# EAGLE board FilterBoard_+-8V_MAX (EAGLE 6.5.0)
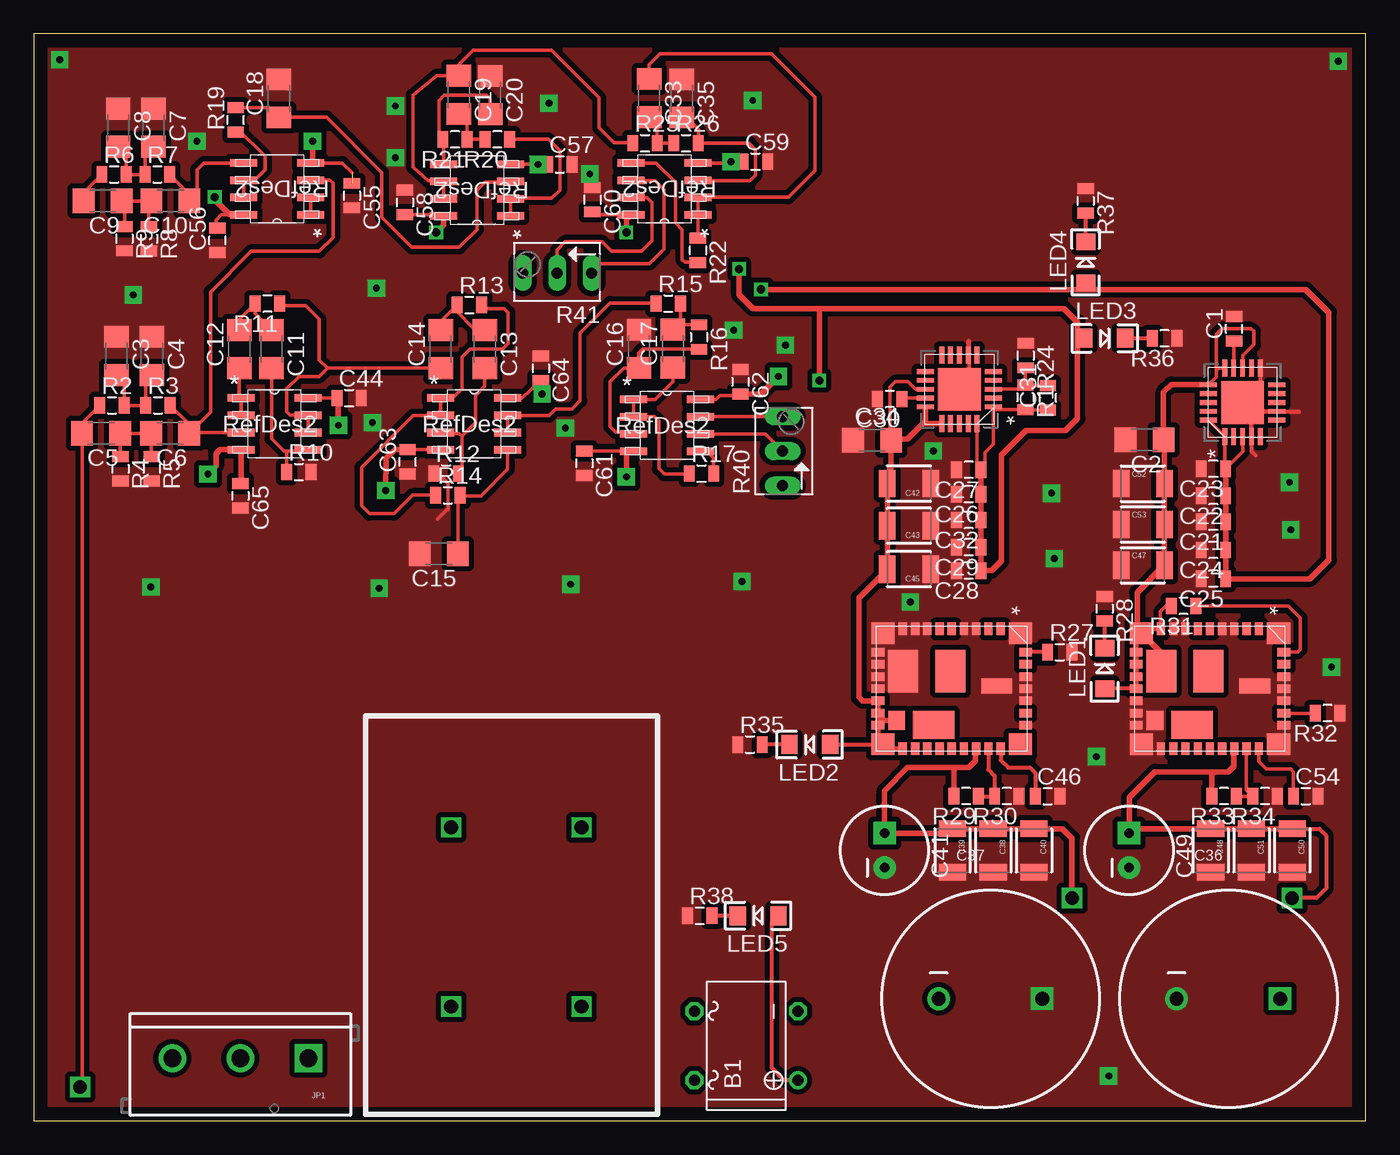
[diagram p0: board, top side]
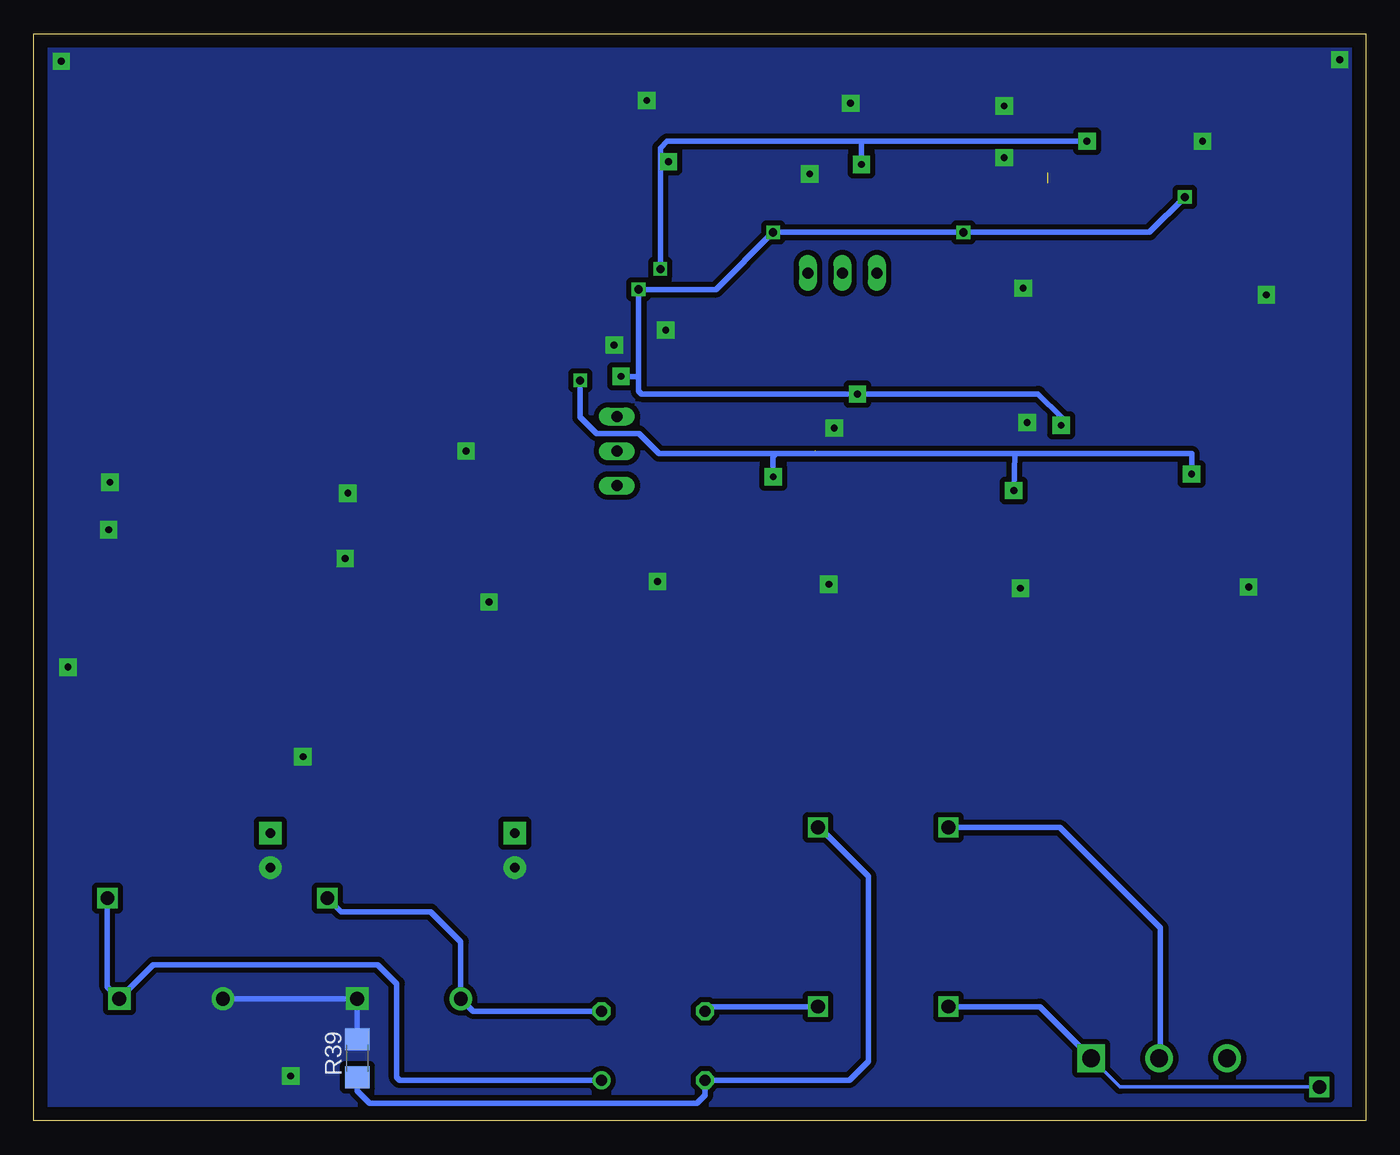
[diagram p1: board, bottom side, seen from below]

Size 98 x 80 mm. Coordinates in mm from the lower left corner, seen from the top.
Outline: 0,0 98,0 98,80 0,80 0,0
Copper layers (1*16): Top 0.035mm / dielectric 1.5mm / Bottom 0.035mm
Design rules "default *": minimum track width 10mil, minimum drill 24mil, track to track 15mil, track to pad 15mil, pad to pad 15mil, via to via 15mil, smd to smd 15mil, copper to edge 40mil, drill to drill 8mil, minimum pad ring 10mil, minimum via ring 8mil, stop-mask expansion 4mil, vias tented up to drill 0mil, thermal gap 10mil
tKeepout: area 30.7,8.4 to 40.3,21.6

## Footprints (pad centres in the part's own frame; a part is rotated, then mirrored left to right if it is on the bottom)
B-DIL = drill 0.813: + -2.54,-3.81 | drill 0.813 octagon: - 2.54,-3.81; AC1 2.54,3.81; AC2 -2.54,3.81
0805 = smd 0.8 x 1.2: 1 -0.9,0; 2 0.9,0
1206 = smd 1.6 x 1.8: 1 -1.4,0; 2 1.4,0
CPOL-RADIAL-1000UF-63V = drill 1.016 pad 1.651 square: 1 3.81,0 | drill 1.016 pad 1.676: 2 -3.81,0
1210 = smd 1.2 x 2: 1 -1.6,0; 2 1.6,0
CPOL-RADIAL-100UF-25V = drill 0.7 pad 1.651 square: 1 1.27,0 | drill 0.7 pad 1.651: 2 -1.27,0
SCREWTERMINAL-5MM-3 = drill 1.3 pad 2.032 square: 1 0,0 | drill 1.3 pad 2.032: 2 5,0; 3 10,0
LED-1206 = smd 1.2 x 1.4: A -1.5,0; C 1.5,0
B64Y = drill 0.813 long: A 2.54,0; E -2.54,0; S 0,0
D8 = smd 1.981 x 0.559: 1 -2.464,1.905; 2 -2.464,0.635; 3 -2.464,-0.635; 4 -2.464,-1.905; 5 2.464,-1.905; 6 2.464,-0.635; 7 2.464,0.635; 8 2.464,1.905
RGW20_3P15X3P15 = smd 1.25 x 0.356: 1 -2.518,1.295; 2 -2.518,0.66; 3 -2.518,0; 4 -2.518,-0.66; 5 -2.518,-1.295; 11 2.518,-1.295; 12 2.518,-0.66; 13 2.518,0; 14 2.518,0.66; 15 2.518,1.295 | smd 0.356 x 1.25: 6 -1.295,-2.518; 7 -0.66,-2.518; 8 0,-2.518; 9 0.66,-2.518; 10 1.295,-2.518; 16 1.295,2.518; 17 0.66,2.518; 18 0,2.518; 19 -0.66,2.518; 20 -1.295,2.518 | smd 3.15 x 3.15: 21 0,0
RKG41 = smd 1.6 x 1.702: 1 0,0; 11 0,-10.109; 19 8.179,-10.109; 29 8.179,0 | smd 0.94 x 0.61: 2 -0.33,-1.448; 3 -0.33,-2.362; 4 -0.33,-3.251; 5 -0.33,-4.166; 6 -0.33,-5.055; 7 -0.33,-5.944; 8 -0.33,-6.858; 9 -0.33,-7.747; 10 -0.33,-8.661; 20 8.509,-8.661; 21 8.509,-7.747; 22 8.509,-6.858; 23 8.509,-5.944; 24 8.509,-5.055; 25 8.509,-4.166; 26 8.509,-3.251; 27 8.509,-2.362; 28 8.509,-1.448 | smd 0.61 x 0.94: 12 1.397,-10.49; 13 2.286,-10.49; 14 3.2,-10.49; 15 4.089,-10.49; 16 4.978,-10.49; 17 5.893,-10.49; 18 6.782,-10.49; 30 6.782,0.381; 31 5.893,0.381; 32 4.978,0.381; 33 4.089,0.381; 34 3.2,0.381; 35 2.286,0.381; 36 1.397,0.381 | smd 1.1 x 2.25: 37 3.88,-1.75 | smd 3.1 x 2.2: 38 2.8,-5.16; 39 2.8,-8.64 | smd 1.4 x 1.24: 40 6.43,-9.11 | smd 2.04 x 3.05: 41 6.75,-6.37

## Placement (x,y rotation side)
B1  [B-DIL]  52.42,5.53 90 top
C1  1uF  [0805]  88.33,58.3 90 top
C2  10uF  [1206]  81.73,50.12 180 top
C3  22nF  [1206]  6.08,56.3 270 top
C4  22nF  [1206]  8.68,56.3 270 top
C5  22nF  [1206]  4.94,50.6 180 top
C6  22nF  [1206]  10.02,50.6 180 top
C7  22nF  [1206]  8.8,73.1 270 top
C8  22nF  [1206]  6.2,73.1 270 top
C9  22nF  [1206]  5.06,67.7 180 top
C10  22nF  [1206]  10.04,67.7 180 top
C11  [1206]  17.49,56.8 270 top
C12  [1206]  15.11,56.8 90 top
C13  [1206]  33.17,56.8 270 top
C14  [1206]  29.93,56.8 90 top
C15  [1206]  29.8,41.73 180 top
C16  [1206]  44.53,56.82 90 top
C17  [1206]  47.03,56.84 90 top
C18  [1206]  18.03,75.26 90 top
C19  [1206]  31.27,75.52 270 top
C20  [1206]  33.57,75.5 270 top
C21  10uF  [0805]  86.8,44.1 180 top
C22  10uF  [0805]  86.8,46 180 top
C23  10uF  [0805]  86.8,48 180 top
C24  10uF  [0805]  86.8,42.02 180 top
C25  10uF  [0805]  86.8,39.9 180 top
C26  10uF  [0805]  68.8,46.12 180 top
C27  10uF  [0805]  68.8,47.92 180 top
C28  10uF  [0805]  68.8,40.5 180 top
C29  10uF  [0805]  68.8,42.22 180 top
C30  1uF  [0805]  62.99,53.12 180 top
C31  10nF  [0805]  74.62,53.23 90 top
C32  10uF  [0805]  68.8,44.22 180 top
C33  [1206]  45.27,75.28 270 top
C34  10uF  [1206]  61.68,50.1 0 top
C35  [1206]  47.67,75.26 270 top
C36  [CPOL-RADIAL-1000UF-63V]  87.91,8.99 0 top
C37  [CPOL-RADIAL-1000UF-63V]  70.4,8.99 0 top
C38  4.7uF 50V  [1210]  70.6,19.9 270 top
C39  4.7uF 50V  [1210]  67.6,19.9 270 top
C40  2.2uF 100V  [1210]  73.6,19.9 270 top
C41  22uF 100V  [CPOL-RADIAL-100UF-25V]  62.6,19.9 90 top
C42  22uF 25V  [1210]  64.4,46.9 180 top
C43  22uF 25V  [1210]  64.4,43.8 180 top
C44  10nF  [0805]  23.2,53.2 0 top
C45  22uF 25V  [1210]  64.4,40.6 180 top
C46  10nF  [0805]  74.6,23.9 0 top
C47  22uF  [1210]  81.6,40.9 0 top
C48  2.2uF 100V  [1210]  86.6,19.9 270 top
C49  27uF 100V  [CPOL-RADIAL-100UF-25V]  80.6,19.9 90 top
C50  2.2uF 100V  [1210]  92.6,19.9 270 top
C51  2.2uF 100V  [1210]  89.6,19.9 270 top
C52  22uF  [1210]  81.6,46.9 0 top
C53  22uF  [1210]  81.6,43.9 0 top
C54  10nF  [0805]  93.6,23.9 0 top
C55  10nF  [0805]  23.4,68.1 270 top
C56  10nF  [0805]  13.5,64.8 90 top
C57  10nF  [0805]  38.7,70.4 0 top
C58  10nF  [0805]  27.3,67.6 270 top
C59  10nF  [0805]  53.1,70.6 0 top
C60  10nF  [0805]  41.1,67.8 270 top
C61  10nF  [0805]  40.5,48.4 270 top
C62  10nF  [0805]  52,54.4 270 top
C63  10nF  [0805]  27.5,48.5 90 top
C64  10nF  [0805]  37.3,55.4 270 top
C65  10nF  [0805]  15.2,46 270 top
JP1  M03-SCREW-5MM  [SCREWTERMINAL-5MM-3]  20.19,4.61 180 top
LED1  [LED-1206]  78.8,33.3 90 top
LED2  [LED-1206]  57.1,27.7 180 top
LED3  [LED-1206]  78.8,57.6 0 top
LED4  [LED-1206]  77.4,63.2 90 top
LED5  [LED-1206]  53.3,15.1 180 top
R1  1.24M  [0805]  72.96,53.25 270 top
R2  121k  [0805]  5.74,52.66 0 top
R3  121k  [0805]  9.13,52.66 0 top
R4  121k  [0805]  6.36,48 270 top
R5  121k  [0805]  8.66,48 270 top
R6  121k  [0805]  5.9,69.66 0 top
R7  121k  [0805]  9.09,69.66 0 top
R8  121k  [0805]  8.46,64.92 270 top
R9  121k  [0805]  6.66,64.93 270 top
R10  [0805]  19.49,47.75 0 top
R11  [0805]  17.19,60.15 180 top
R12  [0805]  30.33,47.65 0 top
R13  [0805]  32.05,60.05 0 top
R14  [0805]  30.47,46.05 0 top
R15  [0805]  46.69,60.15 0 top
R16  [0805]  48.95,57.69 270 top
R17  [0805]  49.13,47.65 0 top
R19  [0805]  14.85,73.67 90 top
R20  [0805]  34.11,72.24 180 top
R21  [0805]  30.99,72.24 180 top
R22  [0805]  48.86,64.07 270 top
R24  215k  [0805]  72.98,56.33 270 top
R25  [0805]  44.97,71.96 0 top
R26  [0805]  47.99,71.96 0 top
R27  178k  [0805]  75.5,34.5 0 top
R28  [0805]  78.8,37.7 270 top
R29  174k  [0805]  68.6,23.9 180 top
R30  15.8k  [0805]  71.6,23.9 180 top
R31  178k  [0805]  84.6,37.9 180 top
R32  178k  [0805]  95.2,30 180 top
R33  174k  [0805]  87.6,23.9 180 top
R34  15.8k  [0805]  90.6,23.9 180 top
R35  [0805]  52.7,27.7 0 top
R36  [0805]  83.2,57.6 180 top
R37  [0805]  77.4,67.7 270 top
R38  [0805]  49,15.1 0 top
R39  0  [1206]  74.2,4.6 90 bottom
R40  [B64Y]  55.1,49.3 90 top
R41  [B64Y]  38.5,62.4 180 top
U1  TLC2272A_D_8  [D8]  17.7,51.3 0 top
U2  TLC2272A_D_8  [D8]  32.4,51.3 0 top
U3  TLC2272A_D_8  [D8]  46.6,51.2 0 top
U4  TLC2272A_D_8  [D8]  17.9,68.6 180 top
U5  TLC2272A_D_8  [D8]  32.6,68.5 180 top
U6  TLC2272A_D_8  [D8]  46.4,68.6 180 top
U7  TPS7A3301_RGW_20  [RGW20_3P15X3P15]  68.11,53.85 180 top
U8  TPS84250_RKG_41  [RKG41]  91.6,35.9 270 top
U$1  TPS84259_RKG_41  [RKG41]  72.6,35.9 270 top
U$2  TPS7A4700_RGW_20  [RGW20_3P15X3P15]  88.95,52.88 90 top

## Library data of the parts
B1 = rectifier
C1-C20 C30 C31 C33-C40 C42-C65 R2-R17 R19-R22 R25 R26 U1-U8 U$1 U$2 = SensorCape
C21-C29 C32 C41 JP1 LED1-LED5 R1 R24 R27-R39 = ASL
R40 R41 = pot

## Nets
GND: C1.2 C2.2 C3.1 C4.1 C7.1 C8.1 C15.2 C16.2 C18.2 C20.1 C21.2 C22.2 C23.2 C24.2 C25.2 C26.2 C27.2 C28.2 C29.2 C30.2 C32.2 C34.1 C35.1 C36.2 C37.1 C38.2 C39.2 C40.2 C41.2 C42.1 C43.1 C44.2 C45.1 C46.2 C47.1 C48.2 C49.2 C50.2 C51.2 C52.1 C53.1 C54.2 C55.2 C56.1 C57.2 C58.1 C59.2 C60.1 C61.2 C62.1 C63.1 C64.1 C65.2 R4.2 R5.2 R8.2 R9.2 R10.2 R12.1 R24.1 R27.2 R28.1 R30.1 R32.1 R34.1 R35.1 R36.1 R37.1 R38.1 R39.2 U7.7 U7.21 U8.1 U8.4 U8.5 U8.8 U8.9 U8.16 U8.17 U8.18 U8.19 U8.20 U8.29 U8.30 U8.32 U8.33 U8.34 U8.37 U8.40 U$1.1 U$1.4 U$1.5 U$1.8 U$1.9 U$1.10 U$1.11 U$1.12 U$1.13 U$1.14 U$1.15 U$1.30 U$1.32 U$1.33 U$1.34 U$1.37 U$1.39 U$2.4 U$2.7 U$2.11 U$2.21
HVDD_8A: C21.1 C22.1 C23.1 C24.1 C25.1 C44.1 C56.2 C58.2 C60.2 C62.2 C64.2 LED4.A U1.8 U2.8 U3.8 U4.8 U5.8 U6.8 U$2.1 U$2.3 U$2.20
HVDD_15D: C2.1 C47.2 C52.2 C53.2 LED1.A R31.2 U8.10 U8.11 U8.12 U8.13 U8.14 U8.15 U8.39 U$2.13 U$2.15 U$2.16
HVDD_IN: B1.+ C36.1 C48.1 C49.1 C50.1 C51.1 LED5.A R33.2 U8.26
HVSS_8A: C26.1 C27.1 C28.1 C29.1 C31.1 C32.1 C55.1 C57.1 C59.1 C61.1 C63.2 C65.1 LED3.A R1.2 U1.4 U2.4 U3.4 U4.4 U5.4 U6.4 U7.1 U7.20
HVSS_15D: C34.2 C42.2 C43.2 C45.2 LED2.A U7.13 U7.15 U7.16 U$1.16 U$1.17 U$1.18 U$1.19 U$1.20 U$1.40
HVSS_IN: B1.- C37.2 C38.1 C39.1 C40.1 C41.1 R29.2 U$1.26
N$1: C1.1 U$2.14
N$2: C3.2 C4.2 R2.2 R3.1
N$3: C9.2 R6.1
N$4: C33.1 R22.1 U6.1 U6.2
N$5: C5.1 C6.2 R4.1 R5.1
N$6: C7.2 C8.2 R6.2 R7.1
N$7: C6.1 R3.2 U1.3 U4.3
N$8: C31.2 R1.1 R24.2 U7.3
N$9: C9.1 C10.2 R8.1 R9.1
N$10: C10.1 R7.2 U4.5
N$11: U4.1 U4.2
N$12: C12.1 U1.1 U1.2
N$13: C11.1 C12.2 R11.2
N$14: C11.2 R10.1 U1.5
N$15: C14.1 R11.1 U1.6 U1.7
N$16: R13.2 R14.1 U2.1 U2.2
N$17: R15.1 U2.6 U2.7
N$18: C17.1 R17.1 U3.1 U3.2
N$19: R40.S U3.6
N$20: C35.2 R26.2 U6.3
N$21: R22.2 U6.5
N$22: R41.E U6.6
N$23: C33.2 R25.2 R26.1
N$24: C19.1 R25.1 U5.6 U5.7
N$25: R27.1 U$1.36
N$26: C20.2 R21.2 U5.5
N$27: C19.2 R20.2 R21.1
N$28: R20.1 U5.1 U5.2
N$29: C18.1 R19.2 U5.3
N$30: LED1.C R28.2
N$31: R19.1 U4.6 U4.7
N$32: R29.1 R30.2 U$1.27
N$33: C30.1 U7.14
N$34: C46.1 U$1.28
N$35: C13.1 C14.2 R13.1
N$36: C13.2 R12.2 U2.3
N$37: R31.1 U8.36
N$38: C15.1 R14.2 U2.5
N$39: R32.2 U8.31
N$40: C17.2 R15.2 R16.1
N$41: C16.1 R16.2 U3.3
N$42: R17.2 U3.5
N$43: R33.1 R34.2 U8.27
N$44: C54.1 U8.28
N$45: LED2.C R35.2
N$46: LED3.C R36.2
N$47: LED4.C R37.2
N$48: LED5.C R38.2
OUT_15_100_KHZ: R40.A U3.7
OUT_15KHZ: R41.S U6.7
VDD_IN: C5.2 JP1.1 R2.1
VDD_IN_CHOKE: B1.AC1
VDD_L: JP1.2
VDD_L_CHOKE: B1.AC2 R39.1

## Tracks (layer width: path | path; a pad name or v marks a point on that pad's centre or on a via)
GND  (via drill 0.5 pad 1.27)
  Top 0.254: 29.7,44.3 30.4,45 30.47,45.01 30.47,46.87 30.39,46.95 30.07,47.39 29.69,47.39 R12.1
  Top 0.305: U7.7 68.77,57.37 68.8,57.4 68.8,55 68.7,54.9 | U$2.11 90.25,54.15 90.2,54.1 | U$2.7 90.12,52.22 90.1,52.2 93.1,52.2 | U$2.4 89.61,51.79 89.6,51.8 89.6,49.3 89.9,49
  Bottom 0.406: R39.2 C37.1 C36.2
  other vias: 40.9,69.7 26.6,70.9 26.6,74.7 12,72.1 37.9,74.9 52.9,75.1 96,78 1.9,78.1 7.3,60.8 24.9,51.4 39.1,51 55.3,57.1 51.5,58.2 25.2,61.3 39.5,39.5 25.4,39.2 8.6,39.3 52.1,39.7 75.1,41.4 74.9,46.2 66.2,49.3 64.5,38.2 92.4,47 92.5,43.5 95.5,33.4 78.2,26.8 79.1,3.3
  pour Bottom (no thermals): 0,80 98,80 98,0 0,0
  pour Top (no thermals): 0,80 98,80 98,0 0,0
HVDD_8A  (via drill 0.5 pad 1.27, 0.6)
  Top 0.254: U$2.3 88.95,49.25 C23.1 87.66,48.05 U$2.1 U$2.20 | U6.8 41.3,66.69 C60.2 | C58.2 30.03,66.7 U5.8 | U4.8 14.4,66.69 13.79,66.69 13.4,66.3 13.4,65.8 C56.2 | U3.8 50.2,53.1 50.5,53.4 51.9,53.4 C62.2 | U2.8 35.91,53.2 C64.2 37.3,53.6 v37.4,53.5 | U1.8 C44.1
  Top 0.406: C23.1 C22.1 C21.1 C24.1 C25.1 93.9,39.9 95.3,41.3 95.3,59.5 93.6,61.2 77.4,61.2 | 77.4,61.2 v53.5,61.2 | U3.8 | v13.3,68 13.3,67.8 14.4,66.69 | v43.6,65.4 43.6,66.36 U6.8 | U5.8 30.14,65.94 v29.6,65.4 | v22.4,51.2 22.4,53.1 C44.1 | C62.2 53.5,53.5 v54.8,54.8 | LED4.A 77.4,61.2
  Bottom 0.406: v13.3,68 15.9,65.4 v29.6,65.4 v43.6,65.4 47.8,61.2 v53.5,61.2 53.5,54.8 | 53.5,54.8 53.5,53.7 53.3,53.5 v37.4,53.5 24.1,53.5 22.4,51.8 v22.4,51.2 | v54.8,54.8 53.5,54.8
HVDD_15D
  Top 0.254: U$2.13 88.95,56.33 89.79,57.13 89.79,58.12 89.54,58.3 87.43,58.3 87,57.9 87,55.2 | 87,55.2 87,54.74 U$2.16 | U$2.15 87.2,55.4 87,55.2 | R31.2 83.3,37.9 82.9,37.5 82.9,36.27 U8.10
  Top 0.305: U8.15 78.81,31.81 LED1.A
  Top 0.406: U8.10 81.82,36.23 U8.11 | U8.15 U8.14 U8.13 U8.12 81.11,35.52 U8.11 | U8.39 82.96,34.43 U8.11 | U8.11 81.2,36.19 81.2,38.9 C47.2 C53.2 C52.2 83.2,50.05 C2.1 83.13,53.63 83.7,54.2 86.41,54.2 U$2.16
HVDD_IN  (via drill 1)
  Top 0.305: B1.+ 55.21,2.99 54.3,3.9 54.3,14.6 LED5.A | C50.1 94.6,21.5 95.1,21 95.1,17.1 94.4,16.4 v92.6,16.4
  Top 0.406: C50.1 C51.1 C48.1 80.93,21.5 C49.1 80.6,23.8 82.5,25.7 86.9,25.7 | 86.9,25.7 87.9,25.7 88.3,26.1 88.3,27.34 U8.26 | R33.2 86.7,25.5 86.9,25.7
  Bottom 0.406: B1.+ 71.09,2.99 71.3,3.2 71.3,10.1 72.7,11.5 89.21,11.5 C36.1 92.6,9.87 v92.6,16.4
HVSS_8A  (via drill 0.5 pad 1.27, 0.6)  (2 unrouted)
  Top 0.254: C31.1 72.98,52.33 R1.2 70.83,52.35 U7.1 70.63,49.83 70,49.2 70,48.38 C27.1 69.41,48.38 U7.20 | U2.4 C63.2 | U3.4 43.6,49.3 C61.1 | U6.4 52.1,70.5 C59.1 | U5.4 C57.1 | U4.4 22.7,70.5 23.4,69.8 | 27.41,49.4 C63.2 | C63.2 | C61.1 40.48,49.3 40.28,49.1
  Top 0.406: C27.1 C26.1 C32.1 C29.1 C28.1 70.5,40.5 71.2,41.2 71.2,49 73,50.8 75.9,50.8 76.8,51.7 76.8,58.2 | 76.8,58.2 76.8,58.8 75.8,59.8 57.8,59.8 | 57.8,59.8 52.9,59.8 51.9,60.8 v51.9,62.7 | 57.8,59.8 v57.8,54.5 | v12.8,47.6 13.4,48.2 13.4,49.1 13.7,49.4 U1.4 15.24,46.94 C65.1 | 27.41,49.4 26.59,49.4 25.9,48.8 v25.89,46.4 | 43.6,49.3 v43.6,47.4 | v20.5,72.1 20.5,70.64 U4.4 | C57.1 v37.1,70.4 | C59.1 v51.3,70.6 | LED3.A 77.3,57.7 76.8,58.2
  Bottom 0.406: v51.9,62.7 51.9,70.7 | 51.9,70.7 51.9,71.6 51.4,72.1 37.1,72.1 | 37.1,72.1 v20.5,72.1 | v57.8,54.5 57.8,51.8 56.59,50.59 53.47,50.59 51.98,49.1 43.4,49.1 | 43.4,49.1 25.8,49.1 | 25.8,49.1 12.8,49.1 v12.8,47.6 | v25.89,46.4 25.8,49.1 | v43.6,47.4 43.6,48.9 43.4,49.1 | v37.1,70.4 37.1,72.1 | v51.3,70.6 51.8,70.6 51.9,70.7
HVSS_15D
  Top 0.254: U7.13 64.87,53.86 64.32,54.41 63.4,54.41 62.99,54 62.99,50.18 C34.2
  Top 0.305: LED2.A 62.47,27.7 U$1.19
  Top 0.406: C43.2 C42.2 63.08,47.02 C34.2 63.18,50.2 64.3,50.2 65.43,51.33 | C43.2 63.2,43.3 | C43.2 C45.2 60.7,38.5 60.7,31.2 60.98,30.92 U$1.16 U$1.17 U$1.18 | U$1.20 62.82,27.39 U$1.19 62.49,28.01 62.1,28.4 62.1,29.11 U$1.18 | U$1.40 62.46,29.47 U$1.18 | U7.15 65.59,51.49 65.43,51.33 | U7.16 65.43,51.33
HVSS_IN  (via drill 1)
  Top 0.406: 67.9,26 64.3,26 62.6,24.3 C41.1 67.27,21.17 C39.1 C38.1 C40.1 75.7,21.5 76.4,20.8 v76.4,16.4 | 67.9,26 68.8,26 69.3,26.5 69.3,27.34 U$1.26 | R29.2 67.7,25.8 67.9,26
  Bottom 0.406: B1.- 65.67,8.07 C37.2 66.59,13.19 68.8,15.4 75.4,15.4 v76.4,16.4
N$1
  Top 0.254: U$2.14 88.29,57.31 C1.1
N$2
  Top 0.254: C3.2 6.64,54.34 R2.2 R3.1 8.23,54.45 C4.2
N$3
  Top 0.254: C9.2 3.66,68.32 R6.1
N$4
  Top 0.254: R22.1 U6.1 U6.2 55.52,67.97 57.49,69.94 57.49,75.34 54.27,78.56 46.09,78.56 45.27,77.74 C33.1
N$5
  Top 0.254: R4.1 6.34,48.92 C5.1 C6.2 8.62,48.94 R5.1
N$6
  Top 0.254: C8.2 6.8,71.1 R6.2 R7.1 8.19,71.09 C7.2
N$7
  Top 0.254: C6.1 11.42,51.27 R3.2 | U4.3 21.77,69.23 22,69 22,65 21,64 16,64 13,61 13,52.18 C6.1 | U1.3 11.48,50.66 C6.1
N$8
  Top 0.254: U7.3 72.66,53.85 R1.1 | R24.2 72.98,54.17 R1.1 | C31.2 72.98,54.13 R1.1
N$9
  Top 0.254: C9.1 7,67.7 | 7,67.7 C10.2 8.46,67.52 R8.1 | R9.1 6.66,67.36 7,67.7
N$10
  Top 0.254: R7.2 11.44,68.21 C10.1 11.74,68 12,68 12,70 12.51,70.5 U4.5
N$11
  Top 0.254: U4.2 U4.1
N$12
  Top 0.254: U1.2 U1.1 15.11,53.33 C12.1
N$13
  Top 0.254: C12.2 15.11,58.97 R11.2 16.29,59.4 C11.1
N$14
  Top 0.254: C11.2 17.49,50.21 18.4,49.3 18.6,49.3 | 18.6,49.3 20.07,49.3 U1.5 | R10.1 18.59,49.29 18.6,49.3
N$15
  Top 0.254: R11.1 18.24,60 20,60 21,59 21,56 21.6,55.4 | 21.6,55.4 21,54.8 19.5,54.8 18.6,53.9 18.6,52.2 18.86,51.94 U1.7 U1.6 | 21.6,55.4 C14.1
N$16
  Top 0.254: R13.2 33.2,59.8 34.6,59.8 34.9,59.5 34.9,57.2 34.5,56.8 32.1,56.8 31.5,56.2 31.5,53.9 30.8,53.2 U2.1 U2.2 29.9,51.9 27.9,51.9 24.1,48.1 24.1,45.3 24.7,44.7 26.5,44.7 27.85,46.05 R14.1
N$17
  Top 0.254: U2.6 U2.7 34.9,51.9 37.9,51.9 38.4,52.4 39.6,52.4 40.2,53 40.2,58 42.4,60.2 45.74,60.2 R15.1
N$18
  Top 0.254: C17.1 47.03,54.43 45.7,53.1 U3.1 U3.2 45.66,51.84 46,51.5 46,48 46.4,47.6 48.18,47.6 R17.1
N$19
  Top 0.254: U3.6 53.84,50.56 R40.S
N$20
  Top 0.254: C35.2 48.04,73.86 48.9,73 R26.2 | R26.2 | R26.2 52.63,71.97 53.1,71.5 53.1,69.6 52.7,69.2 48.9,69.2 U6.3
N$21
  Top 0.254: U6.5 45.8,70.5 47.2,69.1 47.2,66.1 47.7,65.6 47.7,63.4 47.9,63.2 48.83,63.2 R22.2
N$22
  Top 0.254: U6.6 43.97,69.2 45.7,69.2 46.36,68.54 46.36,64.16 45.3,63.1 41.74,63.1 R41.E
N$23
  Top 0.254: C33.2 45.87,73.28 R25.2 R26.1
N$24
  Top 0.254: U5.7 U5.6 30.07,69.2 29,69.2 27.9,70.2 27.9,75.5 29.62,76.92 C19.1 31.27,77.77 32.3,78.8 38.1,78.8 41.6,75.3 41.6,73.1 42.7,72 44.03,72 R25.1
N$25
  Top 0.305: R27.1 U$1.36
N$26
  Top 0.254: U5.5 30.14,72.19 R21.2 29.8,72.53 29.8,75.1 30.2,75.5 33.3,75.5 33.57,75.23 C20.2
N$27
  Top 0.254: R20.2 R21.1 31.89,73.5 C19.2
N$28
  Top 0.254: U5.1 U5.2 35.1,67.9 38.1,67.9 38.7,68.5 38.7,71.4 37.86,72.24 R20.1
N$29
  Top 0.254: R19.2 17.32,74.57 C18.1 21.54,73.86 25.6,69.8 25.6,66.5 27.8,64.3 31.3,64.3 32.6,65.6 32.6,68.5 33.2,69.1 35.03,69.1 U5.3
N$30
  Top 0.305: LED1.C R28.2
N$31
  Top 0.254: U4.7 U4.6 16.23,69.23 17,70 17,71 15,73 15,72.92 R19.1
N$32
  Top 0.305: R29.1 R30.2 70.7,25.4 70.24,25.86 U$1.27
N$33
  Top 0.254: U7.14 63.96,53.19 C30.1
N$34
  Top 0.305: U$1.28 71.15,26.55 71.7,26 73.3,26 73.7,25.6 C46.1
N$35
  Top 0.254: C14.2 29.93,58.83 R13.1 31.15,59.55 32.37,58.33 C13.1
N$36
  Top 0.254: U2.3 30,50.6 31.3,50.6 31.5,50.4 | 31.5,50.4 31.5,47.65 R12.2 | C13.2 33.17,54.07 32.5,53.4 32.5,51.4 31.5,50.4
N$37
  Top 0.254: R31.1 92.3,37.9 93.2,37 93.2,34.7 93,34.5 U8.36
N$38
  Top 0.254: U2.5 34.86,47.96 32.9,46 31.42,46 R14.2 31.2,45.88 C15.1
N$39
  Top 0.254: R32.2 U8.31
N$40
  Top 0.254: R15.2 47.59,58.8 C17.2 47.38,58.59 R16.1
N$41
  Top 0.254: R16.2 44.79,56.79 44.5,56.5 44.5,55.45 C16.1 43.42,55.42 42.4,54.4 42.4,51.1 42.8,50.7 44,50.7 U3.3
N$42
  Top 0.254: U3.5 49.51,49.3 50,48.8 50,47.68 R17.2
N$43
  Top 0.254: U8.27 89.24,24.36 R34.2 R33.1
N$44
  Top 0.254: U8.28 90.15,26.45 90.7,25.9 92.5,25.9 92.7,25.7 C54.1
N$45
  Top 0.305: LED2.C R35.2
N$46
  Top 0.305: LED3.C R36.2
N$47
  Top 0.305: LED4.C R37.2
N$48
  Top 0.305: LED5.C R38.2
OUT_15_100_KHZ
  Top 0.254: U3.7 R40.A
OUT_15KHZ
  Top 0.254: U6.7 45.13,67.97 45.5,67.6 45.5,64.8 44.7,64 42.5,64 41.8,64.7 39.1,64.7 38.5,64.1 R41.S
VDD_IN  (via drill 1)
  Top 0.254: R2.1 3.54,51.36 C5.2 3.54,2.64 v3.4,2.5
  Bottom 0.254: v3.4,2.5 18.08,2.5 JP1.1
  Bottom 0.406: v30.7,8.4 23.98,8.4 JP1.1
VDD_IN_CHOKE  (via drill 1)
  Bottom 0.406: v40.3,8.4 48.28,8.4 B1.AC1
VDD_L  (via drill 1)
  Bottom 0.406: v30.7,21.6 22.5,21.6 15.1,14.2 15.1,4.7 JP1.2
VDD_L_CHOKE  (via drill 1)
  Bottom 0.406: v40.3,21.6 40.2,21.6 36.6,18 36.6,4.4 38,3 B1.AC2 48.61,1.89 49.2,1.3 73.3,1.3 74.2,2.2 R39.1